# Altium PCB Sic_PowerBoard.PcbDoc
Units mm, origin at the board's own origin, x right, y up, seen from the top; angles counter-clockwise.
Board outline 267.46 x 213.36 mm, 2 copper layers (Top Layer, Bottom Layer), stack 0.142 mm thick; 132 components, 73 nets, 346 pads, 115 vias.
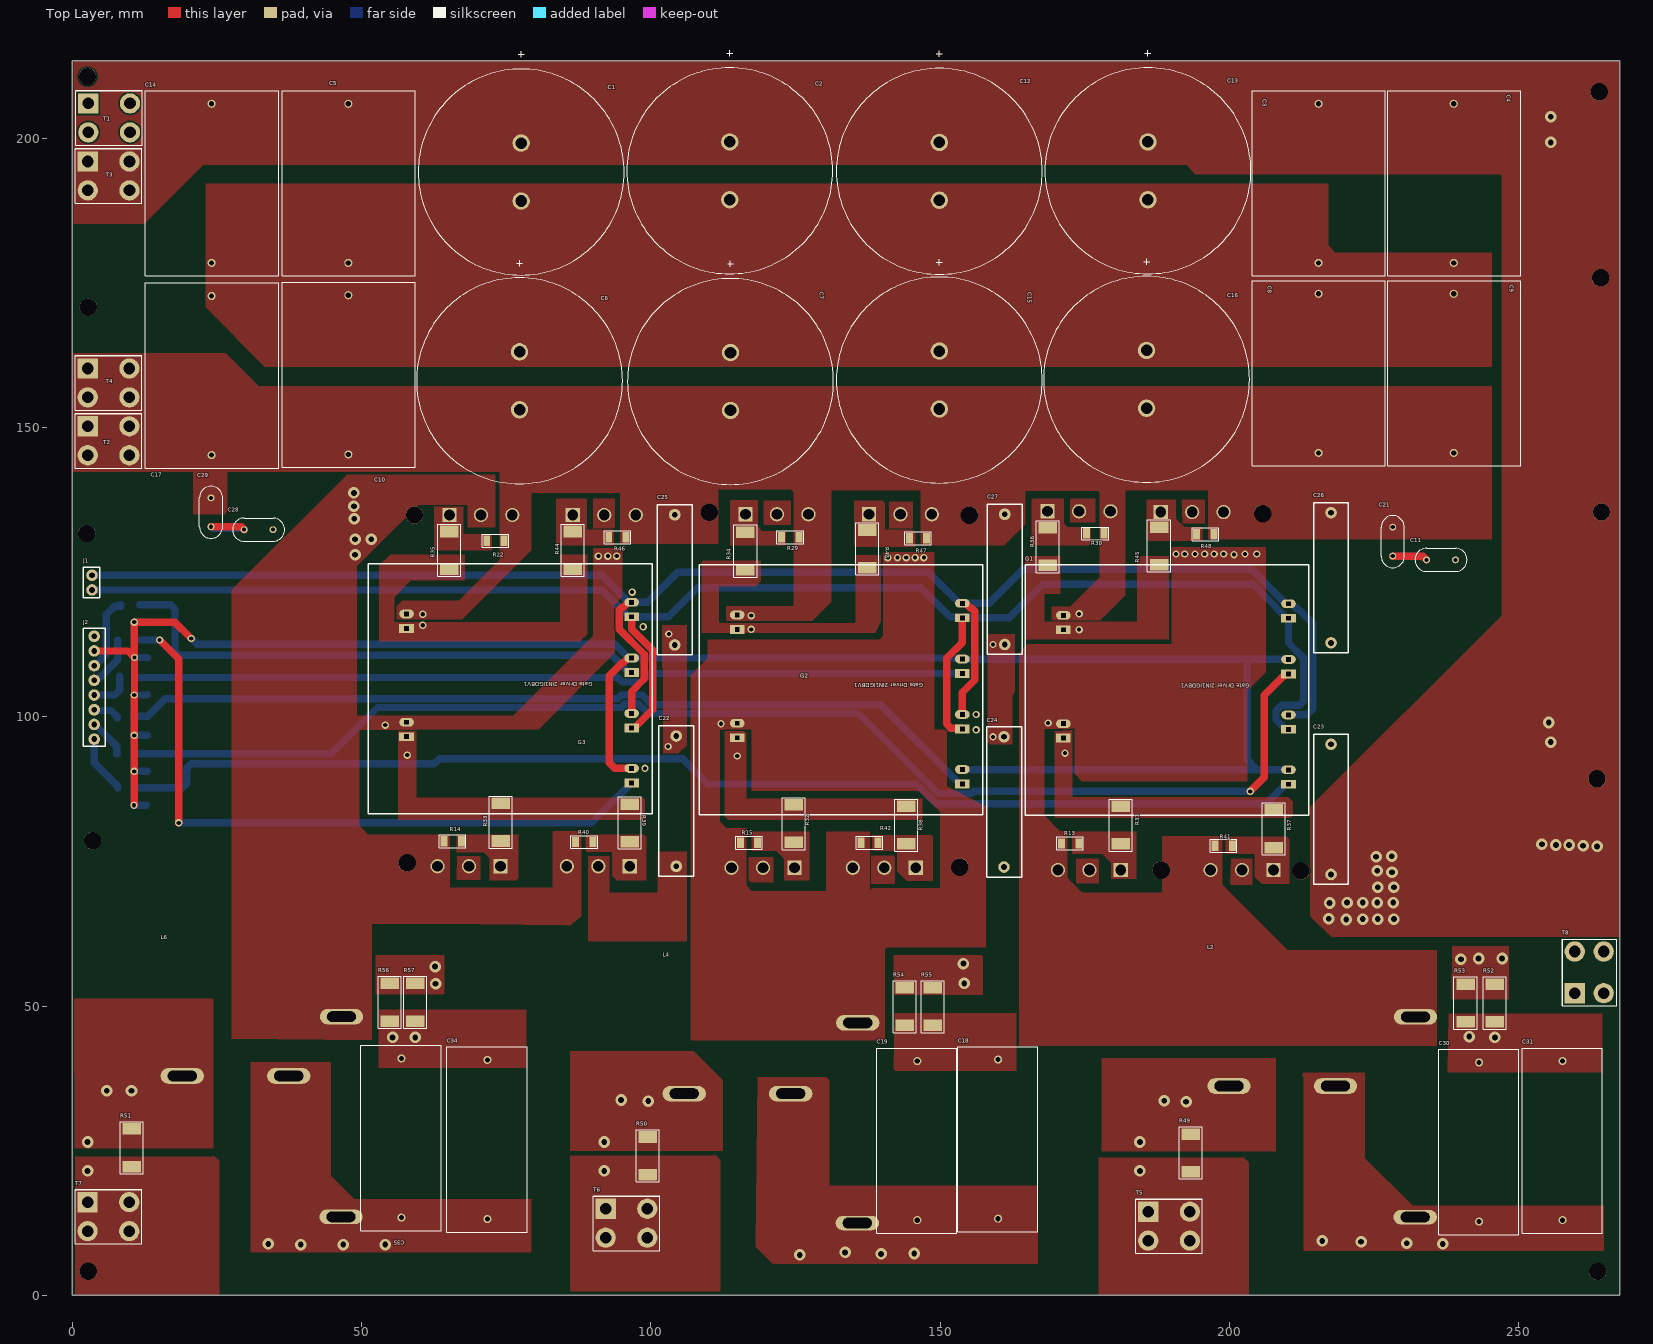
[diagram p0: Top Layer view]
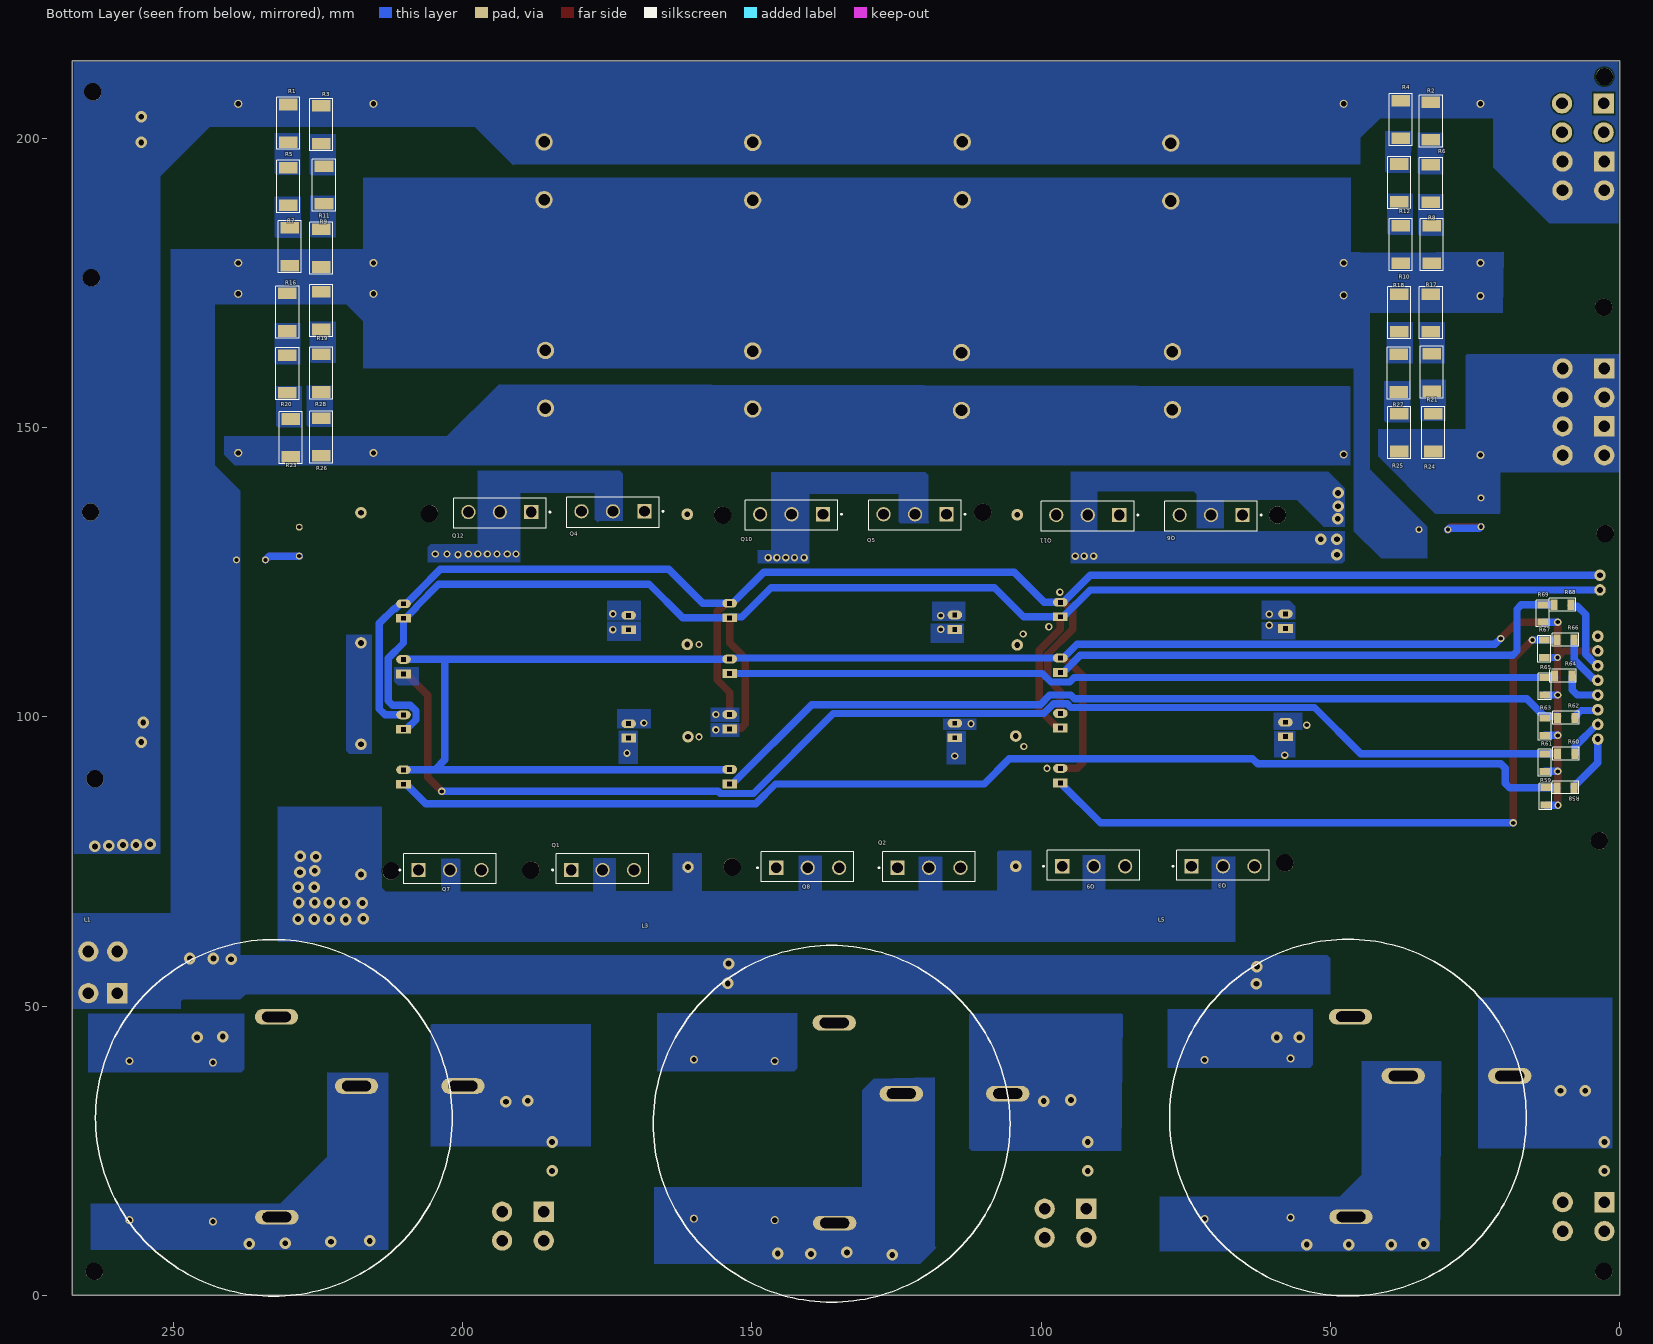
[diagram p1: Bottom Layer view, seen from below]
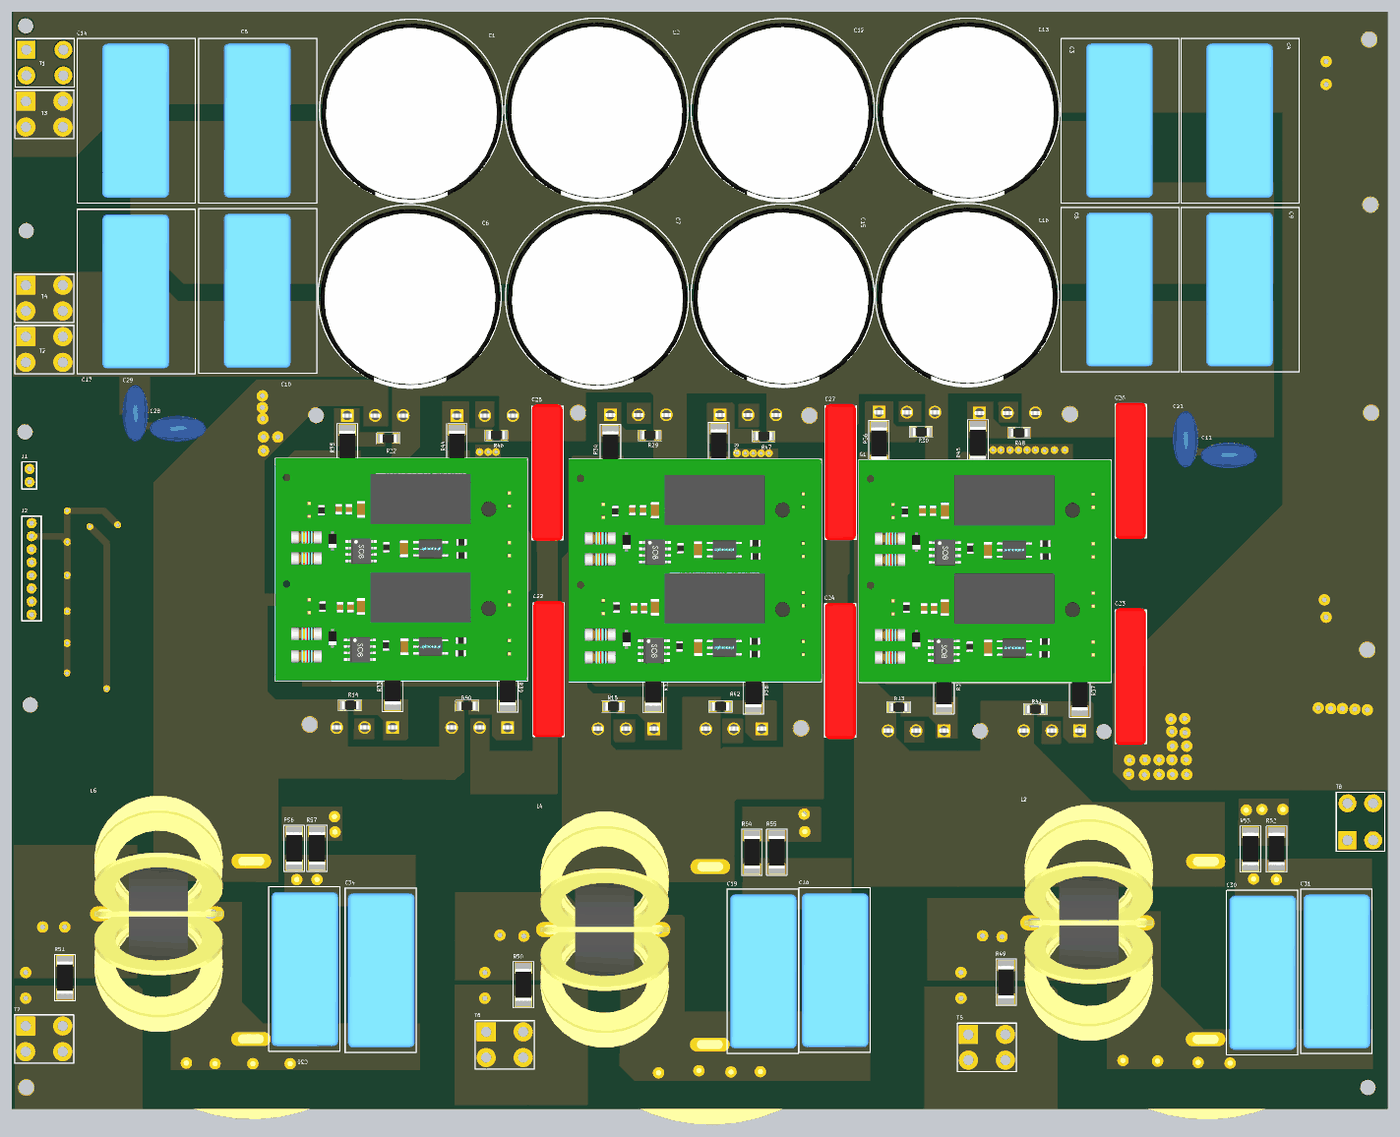
[diagram p2: 3D render of the assembled board from above, using the file's embedded part models]
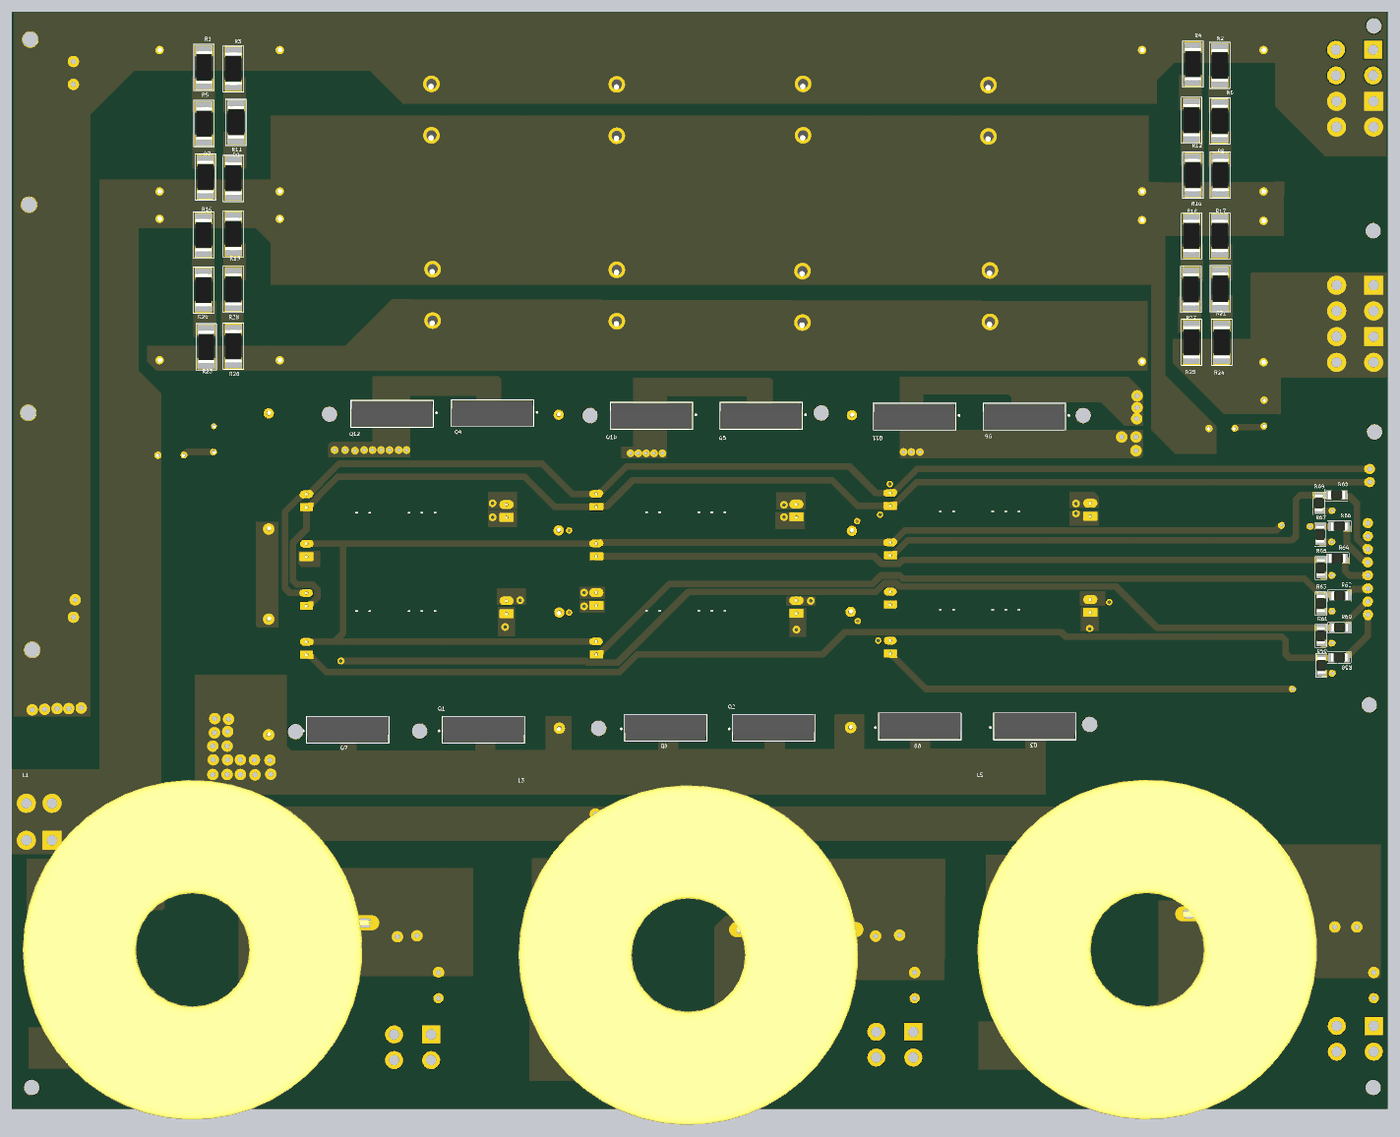
[diagram p3: 3D render of the assembled board from below, using the file's embedded part models]

## Layer stack, top to bottom
Top Solder: solder mask 0.0102, Solder Resist, Dk 3.5
Top Layer: signal copper 0.0356
Dielectric 2: prepreg 0.0711, PP-006, Dk 4.1
Bottom Layer: signal copper 0.0356
Bottom Solder: solder mask 0.0102, Solder Resist, Dk 3.5

## Board outline
0,0 0,212.852 0,213.36 267.462,213.36 267.462,0

## Design rules (kind name [scope] priority, off if disabled: settings)
Clearance [All] p1: gap=0.254 ignorepadtopadclearanceinfootprint=FALSE except(0: Arc-Hole Track-Hole SMDPad-Hole THPad-Hole Via-Hole Fill-Hole Poly-Hole Region-Hole Text-Hole)
ComponentClearance [All] p1: gap=0.254 collisioncheckmode=3 verticalgap=0.1 showdistances=FALSE
Height [All] p1: minheight=0 maxheight=50.8 prefheight=25.4
PolygonConnect [All] p1: connectstyle=Direct reliefconductorwidth=0.254 reliefentries=4 polygonreliefangle="90 Angle" airgapwidth=0.254
RoutingVias [All] p1: holewidth=0.711 width=1.27 viastyle="Through Hole" minholewidth=0.711 minwidth=1.27 maxholewidth=0.711 maxwidth=1.27
SolderMaskExpansion [All] p1: expansion=0.102 istentingtop=FALSE
Width [All] p1: maxlimit=25.4 minlimit=0.254 preferedwidth=0.254 minimp=50.000000 maximp=50.000000 favimp=50.000000
28 further rules are at their usual default settings.

## Components (designator, comment, footprint, x,y, rotation, side; value= is the part's Value field where it differs from the comment)
C1 "220uF" "CAP.EL.220uF 500V" 77.597,189.136 r90 top
C2 "220uF" "CAP.EL.220uF 500V" 113.638,189.357 r90 top
C3 "22uF 500V" "CAP.POL 22UF 500VDC - duplicate" 215.392,178.435 r90 top
C4 "22uF 500V" "CAP.POL 22UF 500VDC - duplicate" 238.76,178.435 r90 top
C5 "22uF 500V" "CAP.POL 22UF 500VDC - duplicate" 47.725,178.435 r90 top
C6 "220uF" "CAP.EL.220uF 500V" 77.316,153.068 r90 top
C7 "220uF" "CAP.EL.220uF 500V" 113.765,152.941 r90 top
C8 "22uF 500V" "CAP.POL 22UF 500VDC - duplicate" 215.392,145.601 r90 top
C9 "22uF 500V" "CAP.POL 22UF 500VDC - duplicate" 238.76,145.601 r90 top
C10 "22uF 500V" "CAP.POL 22UF 500VDC - duplicate" 47.725,145.347 r90 top
C11 "2n2 2000v" "2n2 2000v" 239.061,127.127 r180 top
C12 "220uF" "CAP.EL.220uF 500V" 149.86,189.263 r90 top
C13 "220uF" "CAP.EL.220uF 500V" 185.901,189.357 r90 top
C14 "22uF 500V" "CAP.POL 22UF 500VDC - duplicate" 24.103,178.435 r90 top
C15 "220uF" "CAP.EL.220uF 500V" 149.86,153.195 r90 top
C16 "220uF" "CAP.EL.220uF 500V" 185.674,153.322 r90 top
C17 "22uF 500V" "CAP.POL 22UF 500VDC - duplicate" 24.103,145.22 r90 top
C18 "2.2uF X2" "CAP.POL 2.2UF  x2" 160.02,40.767 r270 top
C19 "2.2uF X2" "CAP.POL 2.2UF  x2" 146.05,40.513 r270 top
C21 "2n2 2000v" "2n2 2000v" 228.219,127.762 r90 top
C22 "680nF bulk" "680nF bulk" 101.394,98.418 r270 top
C23 "680nF bulk" "680nF bulk" 214.551,97 r270 top
C24 "680nF bulk" "680nF bulk" 164.036,72.291 r90 top
C25 "680nF bulk" "680nF bulk" 101.14,136.665 r270 top
C26 "680nF bulk" "680nF bulk" 214.551,137.026 r270 top
C27 "680nF bulk" "680nF bulk" 158.163,136.751 r270 top
C28 "2n2 2000v" "2n2 2000v" 34.718,132.334 r180 top
C29 "2n2 2000v" "2n2 2000v" 24.003,132.842 r90 top
C30 "2.2uF X2" "CAP.POL 2.2UF  x2" 243.146,40.259 r270 top
C31 "2.2uF X2" "CAP.POL 2.2UF  x2" 257.556,40.513 r270 top
C34 "2.2uF X2" "CAP.POL 2.2UF  x2" 71.755,40.708 r270 top
C35 "2.2uF X2" "CAP.POL 2.2UF  x2" 56.896,40.962 r270 top
G1 "GateDriver Board" "Gate Driver" 213.726,126.237 r180 top
G2 "GateDriver Board" "Gate Driver" 157.36,126.307 r180 top
G3 "GateDriver Board" "Gate Driver" 100.21,126.485 r180 top
J1 "2 Pin" 2pin 3.429,124.46 r180 top
J2 "8 Pin" "8 pin connector" 3.81,96.139 r0 top
L1 "267uH" Linverter 232.606,30.683 r0 bottom
L2 "14.4uH" Lgrid 210.6,35.605 r180 top
L3 "267uH" Linverter 136.213,29.667 r0 bottom
L4 "14.4uH" Lgrid 116.459,34.29 r180 top
L5 "267uH" Linverter 46.99,30.734 r0 bottom
L6 "14.4uH" Lgrid 29.718,37.338 r180 top
Q1 "Sic Mosfet" IFX-PG-TO247-3-41 175.789,73.533 r180 bottom
Q2 "Sic Mosfet" IFX-PG-TO247-3-41 119.38,73.914 r180 bottom
Q3 "Sic Mosfet" IFX-PG-TO247-3-41 68.58,74.168 r180 bottom
Q4 "Sic Mosfet" IFX-PG-TO247-3-41 174.011,135.509 r0 bottom
Q5 "Sic Mosfet" IFX-PG-TO247-3-41 121.793,135.001 r0 bottom
Q6 "Sic Mosfet" IFX-PG-TO247-3-41 70.633,134.874 r0 bottom
Q7 "Sic Mosfet" IFX-PG-TO247-3-41 202.184,73.533 r180 bottom
Q8 "Sic Mosfet" IFX-PG-TO247-3-41 140.356,73.914 r180 bottom
Q9 "Sic Mosfet" IFX-PG-TO247-3-41 90.932,74.168 r180 bottom
Q10 "Sic Mosfet" IFX-PG-TO247-3-41 143.129,135.001 r0 bottom
Q11 "Sic Mosfet" IFX-PG-TO247-3-41 91.948,134.874 r0 bottom
Q12 "Sic Mosfet" IFX-PG-TO247-3-41 193.548,135.382 r0 bottom
R1 "330k 1W Each" R-2512W 230.124,202.565 r90 bottom
R2 "1" R-2512W 32.639,202.946 r90 bottom
R3 "1" R-2512W 224.409,202.311 r90 bottom
R4 "1" R-2512W 37.846,203.2 r90 bottom
R5 "1" R-2512W 230.124,191.643 r90 bottom
R6 "1" R-2512W 32.639,192.151 r90 bottom
R7 "1" R-2512W 229.87,181.229 r90 bottom
R8 "1" R-2512W 32.512,181.61 r90 bottom
R9 "1" R-2512W 224.409,180.975 r90 bottom
R10 "1" R-2512W 37.846,181.61 r90 bottom
R11 "1" R-2512W 223.941,191.877 r90 bottom
R12 "1" R-2512W 38.1,192.278 r90 bottom
R13 "10k" R-1206 172.466,78.105 r0 top
R14 "10k" R-1206 65.786,78.486 r0 top
R15 "10k" R-1206 116.967,78.232 r0 top
R16 "330k 1W Each" R-2512W 230.251,169.926 r90 bottom
R17 "1" R-2512W 32.639,169.799 r90 bottom
R18 "1" R-2512W 38.1,169.799 r90 bottom
R19 "1" R-2512W 224.409,170.18 r90 bottom
R20 "1" R-2512W 230.251,159.258 r90 bottom
R21 "1" R-2512W 32.512,159.512 r90 bottom
R22 "10k" R-1206 73.152,130.429 r180 top
R23 "1" R-2512W 229.694,148.209 r90 bottom
R24 "1" R-2512W 32.258,149.098 r90 bottom
R25 "1" R-2512W 38.1,149.098 r90 bottom
R26 "1" R-2512W 224.409,148.336 r90 bottom
R27 "1" R-2512W 38.227,159.385 r90 bottom
R28 "1" R-2512W 224.409,159.385 r90 bottom
R29 "10k" R-1206 124.079,131.064 r180 top
R30 "10k" R-1206 176.784,131.699 r180 top
R31 "2.2R" R-2512W 181.208,81.28 r270 top
R32 "2.2R" R-2512W 124.714,81.534 r270 top
R33 "2.2R" R-2512W 74.041,81.788 r270 top
R34 "2.2R" R-2512W 116.353,128.651 r90 top
R35 "2.2R" R-2512W 65.193,128.778 r90 top
R36 "2.2R" R-2512W 168.571,129.413 r90 top
R37 "2.2R" R-2512W 207.624,80.645 r270 top
R38 "2.2R" R-2512W 144.145,81.28 r270 top
R39 "2.2R" R-2512W 96.372,81.661 r270 top
R40 "10k" R-1206 88.519,78.359 r0 top
R41 "10k" R-1206 199.009,77.724 r0 top
R42 "10k" R-1206 137.795,78.232 r0 top
R43 "2.2R" R-2512W 137.414,129.032 r90 top
R44 "2.2R" R-2512W 86.508,128.778 r90 top
R45 "2.2R" R-2512W 187.833,129.54 r90 top
R46 "10k" R-1206 94.234,131.064 r180 top
R47 "10k" R-1206 146.177,130.874 r180 top
R48 "10k" R-1206 195.834,131.536 r180 top
R49 "10mR 6W" R-2512W 193.294,24.638 r90 top
R50 "10mR 6W" R-2512W 99.441,24.13 r90 top
R51 "10mR 6W" R-2512W 10.287,25.527 r90 top
R52 "0.5R 6W" R-2512W 245.872,50.546 r270 top
R53 "0.5R 6W" R-2512W 240.792,50.546 r270 top
R54 "0.5R 6W" R-2512W 143.891,49.911 r270 top
R55 "0.5R 6W" R-2512W 148.717,49.911 r270 top
R56 "0.5R 6W" R-2512W 54.864,50.673 r270 top
R57 "0.5R 6W" R-2512W 59.309,50.673 r270 top
R58 "10k" R-1206 9.398,87.759 r180 bottom
R59 "10k" R-1206 12.827,86.259 r90 bottom
R60 "10k" R-1206 9.271,93.599 r180 bottom
R61 "10k" R-1206 12.954,92.075 r90 bottom
R62 "10k" R-1206 9.271,99.798 r180 bottom
R63 "10k" R-1206 12.954,98.298 r90 bottom
R64 "10k" R-1206 9.779,107.061 r180 bottom
R65 "10k" R-1206 12.954,105.283 r90 bottom
R66 "10k" R-1206 9.398,113.284 r180 bottom
R67 "10k" R-1206 13.081,111.76 r90 bottom
R68 "10k" R-1206 9.906,119.38 r180 bottom
R69 "10k" R-1206 13.335,117.856 r90 bottom
T1 "TCon" tCon 2.794,205.994 r0 top
T2 "TCon" tCon 2.692,150.195 r0 top
T3 "TCon" tCon 2.706,195.961 r0 top
T4 "TCon" tCon 2.692,160.194 r0 top
T5 "TCon" tCon 185.967,14.478 r0 top
T6 "TCon" tCon 92.202,14.986 r0 top
T7 "TCon" tCon 2.667,16.129 r0 top
T8 "TCon" tCon 259.668,52.236 r90 top

## Footprints (in the part's own frame and the unit in brackets; to place one, negate y for a bottom-side part, rotate by r counter-clockwise, add the part's x,y. Pads: shape width x height; smd on the part's side, far side on the other; paste and mask are expansions set on the pad)
"2n2 2000v" [mm]
  round 1.2 hole 0.7: 1(0,0) 2(5,0)
  silkscreen extent -2,-2 7,2, body extent -3.05,-2.47 7.95,2.53, height 12.5
2pin [mm]
  round 2 hole 1: 1(0,0) 2(0,2.54)
  silkscreen extent -1.38,-1.4 1.48,3.93
"8 pin connector" [mm]
  round 2 hole 1: 1(0,0) 2(0,2.54) 3(0,5.08) 4(0,7.62) 5(0,10.16) 6(0,12.7) 7(0,15.24) 8(0,17.78)
  silkscreen extent -1.88,-1.22 1.88,19.15
"680nF bulk" [mm]
  round 2 hole 1: 1(1.75,3) 2(24.25,3)
  silkscreen extent 0,-0.03 25.95,6, body extent -0.35,-0.05 26.15,5.95, height 15
"CAP.EL.220uF 500V" [mm]
  round 3 hole 2: 1(0,0) 2(10,0)
  silkscreen extent -12.8,-17.8 25.85,17.8, body extent -13.03,-17.57 21.99,17.42, height 40.03
"CAP.POL 2.2UF  x2" [mm]
  round 1.4 hole 0.9: 1(0,0) 2(27.5,0)
  silkscreen extent -2.25,-6.98 29.75,6.86, body extent -1.22,-6.45 28.77,6.55, height 23.01
"CAP.POL 22UF 500VDC - duplicate" [mm]
  round 1.4 hole 0.9: 1(0,0) 2(27.5,0)
  silkscreen extent -2.25,-11.56 29.75,11.43, body extent -1.22,-6.45 28.77,6.55, height 23.01
"Gate Driver" [mil]
  rect 99.37x60 hole 30 square: 1(138.78,1492.13) 3(138.78,1118.11) 5(138.78,741.14) 7(138.78,362.2) 9(1670.28,1178.15) 11(1670.28,440.94)
  oval 99.37x60 hole 30 square: 2(138.78,1393.7) 4(138.78,1019.68) 6(138.78,642.72) 8(138.78,263.78) 10(1670.28,1079.72) 12(1670.28,342.52)
  silkscreen extent 0,0 1929,1703, body extent 0,0 1933,1703, height 565
IFX-PG-TO247-3-41 [mm] "TO247-Diode; 3 pin, 5.44 mm pitch, 15.90 mm L X 5.00 mm W X 26.00 mm H body"
  rect 2.46x2.46 hole 1.86 paste+0 mask+0: 1(-5.44,0)
  round 2.46 hole 1.86 paste+0 mask+0: 2(0,0) 3(5.44,0)
  silkscreen extent -8.78,-2.4 8,2.8, body extent -7.95,-2.23 7.95,2.77, height 26
Lgrid [mm]
  oval 7.5x2.7 hole 1.8 slot 5 at 0 deg: 1(10.687,-0.59) 2(-7.713,-0.59)
  body extent -11.28,-23.59 13.72,22.41, height 48.01
Linverter [mm]
  oval 7.5x2.5 hole 1.8 slot 5 at 0 deg: 1(-0.525,17.15)
  oval 7.5x2.7 hole 1.8 slot 5 at 0 deg: 2(-0.45,-17.45)
  silkscreen extent -30.83,-30.83 30.83,30.83, body extent -33.3,-33.27 32.74,32.77, height 43.89
R-1206 [mm]
  rect 1.2x1.8 smd: 1(-1.5,0) 2(1.5,0)
  silkscreen extent -2.33,-1.1 2.27,1.13, body extent -1.6,-0.78 1.6,0.83, height 0.56
R-2512W [mm] "resistor 2512 wave soldering"
  rect 2x3.2 smd: 1(-3.25,0) 2(3.25,0)
  silkscreen extent -4.5,-2 4.5,2, body extent -3.15,-1.55 3.15,1.55, height 0.55
tCon [mm]
  round 3.5 hole 2: 1(0,-5) 1(7.2,-5) 1(7.2,0)
  rect 3.5x3.5 hole 2: 1(0,0)
  silkscreen extent -2.15,-7.22 9.35,2.18

## Part data
C1 C2 C6 C7 C12 C13 C15 C16: library part "CAP.EL.220uF 500V", ComponentLink1Description=https://www.ozdisan.com/pasif-komponentler/kondansatorler/aluminyum-kondansatorler/K055002210PM0E040, ComponentLink1URL=https://www.ozdisan.com/pasif-komponentler/kondansatorler/aluminyum-kondansatorler/K055002210PM0E040
C3 C4 C5 C8 C9 C10 C14 C17: library part "CAP.POL 22UF 500VDC", ComponentLink1Description=https://www.ozdisan.com/pasif-komponentler/kondansatorler/film-kondansatorler/C3D2H226JB00C00, ComponentLink1URL=https://www.ozdisan.com/pasif-komponentler/kondansatorler/film-kondansatorler/C3D2H226JB00C00
L1 L3 L5: library part Linverter
L2 L4 L6: library part Lgrid
Q1 Q2 Q3 Q4 Q5 Q6 Q7 Q8 Q9 Q10 Q11 Q12: library part "Sic Mosfet To247", "SiC Mosfet To247"
R1 R2 R3 R4 R5 R6 R7 R8 R9 R10 R11 R12 R16 R17 R18 R19 R20 R21 R23 R24 R25 R26 R27 R28 R31 R32 R33 R34 R35 R36 R37 R38 R39 R43 R44 R45: library part "0207 melf", ComponentLink1Description=https://www.ozdisan.com/pasif-komponentler/direncler/smt-smd-direncler/M271UFG100KT20, ComponentLink1URL=https://www.ozdisan.com/pasif-komponentler/direncler/smt-smd-direncler/M271UFG100KT20
R13 R14 R15 R22 R29 R30 R40 R41 R42 R46 R47 R48 R58 R59 R60 R61 R62 R63 R64 R65 R66 R67 R68 R69: library part R-1206, "Res1206"
R49 R50 R51 R52 R53 R54 R55 R56 R57: library part IsabelShunt, ComponentLink1Description=https://www.ozdisan.com/pasif-komponentler/direncler/smt-smd-direncler/M271UFG100KT20, ComponentLink1URL=https://www.ozdisan.com/pasif-komponentler/direncler/smt-smd-direncler/M271UFG100KT20
T1 T2 T3 T4 T5 T6 T7 T8: library part "Terminal Connector", ComponentLink1Description=https://www.ozdisan.com/konnektor-baglanti-elemanlari/terminal-konnektorler/vida-tipi-konnektorler/K36-00AH, ComponentLink1URL=https://www.ozdisan.com/konnektor-baglanti-elemanlari/terminal-konnektorler/vida-tipi-konnektorler/K36-00AH

## Free pads (board coordinates)
  round 3 hole 3: 71(2.526,131.664) 71(2.66,210.636) 71(2.78,4.156) 71(2.78,170.78) 71(3.542,78.578) 71(57.898,74.768) 71(59.168,134.871) 71(110.095,135.347) 71(153.406,74.031) 71(155.053,134.839) 71(188.2,73.498) 71(205.726,135.114) 71(212.33,73.371) 71(263.525,89.281) 71(263.638,4.156) 71(263.892,207.991) 71(264.146,175.86) 71(264.287,135.382)

## Via types
v1: diameter 2, hole 1, Top Layer to Bottom Layer, 67 vias
v2: diameter 1.27, hole 0.711, Top Layer to Bottom Layer, 48 vias

## Nets (pads, with @x,y where several pads share a name; then routed paths per layer and width w, separated by ;. In a path a pad name is that pad's centre, name@x,y a point inside that pad or via, vN(x,y) a via of type N, cw(c..) or ccw(c..) an arc to the next point about the centre after c; other vN are vias at no path point)
A: G1.10 L1.2 pad.71@188.2,73.498 Q1.3 Q4.2 Q7.3 Q12.2 R13.1 R41.1
  other v2: 168.656,98.933 200.787,128.016 190.754,128.143 192.278,128.143 194.056,128.143 195.707,128.143 197.358,128.143 198.988,128.143 202.692,128.143 204.724,128.143
B: G2.10 L3.2 pad.71@153.406,74.031 Q2.3 Q5.2 Q8.3 Q10.2 R15.1 R42.1
  other v2: 112.141,98.806 140.97,127.508 142.621,127.508 144.145,127.508 145.669,127.508 147.193,127.508
C: G3.10 L5.2 pad.71@57.898,74.768 pad.71@59.168,134.871 Q3.3 Q6.2 Q9.3 Q11.2 R14.1 R40.1
  other v1: 48.895,128.016 48.895,130.683 51.689,130.683 48.768,134.239 48.691,136.398 48.691,138.684
  other v2: 54.11,98.552 90.932,127.762 92.583,127.762 94.107,127.762
GND: C6.1 C7.1 C8.1 C9.1 C10.1 C15.1 C16.1 C17.1 C21.2 C25.1 C26.1 C27.1 C29.2 G1.12 G2.12 G3.12 pad.71@110.095,135.347 pad.71@155.053,134.839 pad.71@205.726,135.114 Q4.3 Q5.3 Q6.3 Q10.3 Q11.3 Q12.3 R22.1 R23.1 R24.1 R25.1 R26.1 R29.1 R30.1 R46.1 R47.1 R48.1 T2.1 T4.1
  other v2: 117.348,117.475 60.579,117.729 174.011,117.785
NetC1_2: C1.2 C2.2 C3.2 C4.2 C5.2 C12.2 C13.2 C14.2 C22.2 C23.2 C24.1 pad.71@263.525,89.281 pad.71@263.892,207.991 pad.71@264.146,175.86 pad.71@264.287,135.382 Q1.2 Q2.2 Q3.2 Q7.2 Q8.2 Q9.2 R1.2 R2.2 R3.2 R4.2 T3.1
  other v1: 220.192,64.967 223.05,65.036 225.628,65.036 228.422,65.036 217.144,65.094 217.297,67.818 217.297,67.818 220.319,67.888 223.05,67.888 225.526,67.888 228.32,67.888 225.628,70.555 228.422,70.555 228.092,73.152 225.52,73.387 225.342,75.8 228.034,75.909 263.525,77.597 261.112,77.724 256.413,77.851 258.699,77.851 254,77.978 255.524,95.631 255.18,99.011 255.524,199.263 255.524,203.708
NetC11_2: C11.2 C21.1 | length 12.2
  Top Layer w1.27: C21.1 233.426,127.762 C11.2
  Bottom Layer w1.27: C21.1 233.426,127.762 C11.2
NetC18_1: C18.1 C19.1 R54.2 R55.2
NetC18_2: C18.2 C19.2 L3.1 L4.2
  other v1: 125.726,7.007 139.801,7.182 145.516,7.251 133.578,7.436
NetC22_1: C22.1 C25.2
  other v2: 102.997,94.869 103.129,114.3
NetC23_1: C23.1 C26.2
NetC24_2: C24.2 C27.2
  other v2: 159.131,96.541 159.131,112.501
NetC28_2: C28.2 C29.1 | length 11.9
  Top Layer w1.27: C29.1 29.21,132.842 C28.2
  Bottom Layer w1.27: C29.1 24.257,132.588 29.464,132.588 C28.2
NetC30_1: C30.1 C31.1 R52.2 R53.2
  other v1: 245.868,44.599 241.423,44.726
NetC30_2: C30.2 C31.2 L1.1 L2.2
  other v1: 236.851,8.912 230.628,9.039 222.754,9.293 216.023,9.42
NetC34_1: C34.1 C35.1 R56.2 R57.2
  other v1: 55.368,44.599 59.305,44.599
NetC34_2: C34.2 C35.2 L5.1 L6.2
  other v1: 39.493,8.785 46.842,8.785 54.098,8.785 33.905,8.912
NetG1_1: G1.1 R58.1 R59.2 | length 207.5
  Bottom Layer w1.27: R58.1 R59.2 19.066,87.759 19.81,88.503 19.81,91.117 20.554,91.861 62.595,91.861 63.47,92.736 105.511,92.736 109.855,88.392 145.927,88.392 149.356,84.963 206.327,84.963 209.701,88.337 G1.1
NetG1_2: G1.2 G1.6 G2.2 G2.6 G3.2 G3.6 J2.7 R59.1 R61.1 R63.1 R65.1 R67.1 R69.1 | length 356.2
  Top Layer w1.27: J2.7 9.652,111.379 v2@10.721,110.31 ; v2(10.683,84.724) 10.721,84.762 v2(10.721,90.575) v2(10.721,96.798) v2(10.721,103.759) 10.771,103.809 v2(10.771,110.26) v2@10.721,110.31 ; v2(20.574,113.538) 17.756,116.356 v2(10.721,116.356) v2@10.721,110.31 ; G3.2 96.636,91.134 93.76,91.134 92.837,92.057 92.837,107.093 95.055,109.311 95.267,109.311 96.116,110.16 G3.6
  Bottom Layer w1.27: J2.7 J2.7@3.941,111.379 ; v2(10.683,84.724) 12.792,84.724 R59.1 ; v2(10.721,90.575) R61.1 ; v2(10.721,96.798) R63.1 ; v2(10.721,103.759) 12.93,103.759 R65.1 ; v2(10.721,116.356) R69.1 ; v2(10.771,110.26) R67.1 ; v2(20.574,113.538) 21.59,112.522 93.823,112.522 96.102,110.243 96.602,110.243 G3.6 153.088,110.16 153.266,109.982 G2.6 153.87,109.947 203.073,109.947 210.166,109.947 G1.6 ; G3.2 G3.2@97.254,91.085 ; G2.2 153.87,90.872 204.766,90.872 ; 203.073,109.855 203.073,92.565 204.766,90.872 ; G1.2 210.166,90.872 204.766,90.872
NetG1_3: G1.3 G1.7 G2.3 G2.7 G3.3 G3.7 J1.2 | length 288.3
  Top Layer w1.27: G3.3 97.185,98.085 100.36,101.26 100.36,111.475 96.685,115.15 G3.7 ; G2.3 153.708,98.034 151.856,98.034 151.112,98.778 151.112,110.094 153.835,112.817 G2.7
  Bottom Layer w1.27: J1.2 91.55,121.92 96.185,117.285 G3.7 103.061,117.285 108.077,122.301 146.685,122.301 151.752,117.234 153.708,117.234 G2.7 161.938,117.107 167.767,122.936 204.089,122.936 208.05,118.975 208.05,118.853 209.574,117.329 209.574,117.164 209.701,117.037 G1.7 210.201,112.746 212.852,110.096 212.852,102.732 212.108,101.988 209.017,101.988 208.05,101.021 208.05,99.488 209.701,97.837 G1.3
  other v2: 156.21,97.737
NetG1_4: G1.4 G1.8 G2.4 G2.8 G3.4 G3.8 J1.1 | length 287.5
  Top Layer w1.27: G3.4 96.685,104.379 98.836,106.53 98.836,110.844 94.534,115.146 94.534,118.415 95.055,118.936 95.267,118.936 96.116,119.785 G3.8 ; G2.4 153.835,104.201 155.986,106.352 155.986,118.237 155.465,118.758 155.253,118.758 154.404,119.607 G2.8
  Bottom Layer w1.27: J1.1@3.556,124.46 91.51,124.46 96.185,119.785 G3.8 99.465,119.785 104.648,124.968 147.974,124.968 153.335,119.607 G2.8 158.469,119.607 164.338,125.476 203.835,125.476 207.569,121.742 207.569,121.668 209.618,119.62 210.118,119.62 G1.8 210.77,119.537 211.619,118.688 211.831,118.688 214.376,116.143 214.376,101.346 213.367,100.337 G1.4
  other v2: 156.21,100.407
NetG1_5: G1.5 R60.1 R61.2 | length 225.7
  Top Layer w1.27: v2(203.581,87.122) 205.994,89.535 205.994,103.705 209.574,107.285 210.074,107.285 G1.5
  Bottom Layer w1.27: R60.1@11.129,93.599 R61.2@12.954,93.599 ; R61.2@13.219,93.599 44.778,93.599 52.779,101.6 94.865,101.6 95.501,102.236 97.869,102.236 99.545,100.56 135.914,100.56 149.718,86.756 155.465,86.756 155.831,87.122 v2(203.581,87.122)
NetG1_9: G1.9 R31.1 R37.1
  other v2: 171.577,93.726
NetG1_11: G1.11 R36.1 R45.1
  other v2: 174.011,115.062
NetG2_1: G2.1 R62.1 R63.2 | length 151
  Bottom Layer w1.27: R62.1@10.721,100.076 13.067,100.076 16.115,103.124 94.234,103.124 94.87,103.76 98.5,103.76 100.176,102.084 139.658,102.084 153.335,88.407 G2.1
NetG2_5: G2.5 R64.1 R65.2 | length 143.5
  Bottom Layer w1.27: R64.1@11.279,106.783 94.281,106.783 95.055,106.009 98.315,106.009 99.788,107.482 G2.5
NetG2_9: G2.9 R32.1 R38.1
  other v2: 114.935,93.218
NetG2_11: G2.11 R34.1 R43.1
  other v2: 117.348,115.107
NetG3_1: G3.1 R66.1 R67.2 | length 118.4
  Top Layer w1.27: v2(15.113,113.284) 18.415,109.982 v2(18.415,81.661)
  Bottom Layer w1.27: R66.1 10.91,113.272 13.069,113.272 R67.2 13.105,113.284 v2(15.113,113.284) ; v2(18.415,81.661) 89.761,81.661 G3.1
NetG3_5: G3.5 R68.1 R69.2 | length 94.1
  Bottom Layer w1.27: R68.1@11.684,119.356 R69.2 17.036,119.356 17.78,118.612 17.78,111.361 18.524,110.617 93.228,110.617 96.185,107.66 G3.5
NetG3_9: G3.9 R33.1 R39.1
  other v2: 57.912,93.385
NetG3_11: G3.11 R35.1 R44.1
  other v2: 60.579,115.824
NetJ2_1: J2.1 R58.2 | length 10.1
  Bottom Layer w1.27: J2.1 3.81,92.077 7.898,87.989 R58.2
NetJ2_2: J2.2 R60.2 | length 6.8
  Bottom Layer w1.27: J2.2 3.941,98.679 7.736,94.884 7.736,93.634 R60.2
NetJ2_3: J2.3 R62.2 | length 4.7
  Bottom Layer w1.27: J2.3 3.945,101.084 6.715,101.084 7.771,100.028 R62.2
NetJ2_4: J2.4 R64.2 | length 7.2
  Bottom Layer w1.27: J2.4 7.366,103.759 8.244,104.637 8.244,107.026 R64.2
NetJ2_5: J2.5 R66.2 | length 9
  Bottom Layer w1.27: J2.5 4.008,106.299 4.373,106.664 4.683,106.664 7.898,109.879 R66.2
NetJ2_6: J2.6 R68.2 | length 13.1
  Bottom Layer w1.27: J2.6 3.941,108.839 5.91,110.808 5.91,117.67 7.366,119.126 8.371,119.126 8.406,119.161 R68.2
NetJ2_8: J2.8
NetL2_1: L2.1 R49.2
  other v1: 184.531,26.523 192.506,33.471 188.722,33.655
NetL4_1: L4.1 R50.2
  other v1: 91.948,26.523 99.542,33.598 94.869,33.782
NetL6_1: L6.1 R51.2
  other v1: 2.667,26.523 5.969,35.376 10.261,35.376
NetQ1_1: Q1.1 R13.2 R31.2
NetQ2_1: Q2.1 R15.2 R32.2
NetQ3_1: Q3.1 R14.2 R33.2
NetQ4_1: Q4.1 R30.2 R36.2
NetQ5_1: Q5.1 R29.2 R34.2
NetQ6_1: Q6.1 R22.2 R35.2
NetQ7_1: Q7.1 R37.2 R41.2
NetQ8_1: Q8.1 R38.2 R42.2
NetQ9_1: Q9.1 R39.2 R40.2
NetQ10_1: Q10.1 R43.2 R47.2
NetQ11_1: Q11.1 R44.2 R46.2
NetQ12_1: Q12.1 R45.2 R48.2
NetR1_1: R1.1 R5.2
NetR2_1: R2.1 R6.2
NetR3_1: R3.1 R11.2
NetR4_1: R4.1 R12.2
NetR5_1: R5.1 R7.2
NetR6_1: R6.1 R8.2
NetR9_2: R9.2 R11.1
NetR10_2: R10.2 R12.1
NetR16_1: R16.1 R20.2
NetR17_1: R17.1 R21.2
NetR18_1: R18.1 R27.2
NetR19_1: R19.1 R28.2
NetR20_1: R20.1 R23.2
NetR21_1: R21.1 R24.2
NetR25_2: R25.2 R27.1
NetR26_2: R26.2 R28.1
NetR49_1: R49.1 T5.1
  other v1: 184.531,21.523
NetR50_1: R50.1 T6.1
  other v1: 91.948,21.523
NetR51_1: pad.71@2.78,4.156 R51.1 T7.1
  other v1: 2.667,21.523
PGND: C1.1 C2.1 C3.1 C4.1 C5.1 C6.2 C7.2 C8.2 C9.2 C10.2 C11.1 C12.1 C13.1 C14.1 C15.2 C16.2 C17.2 C28.1 R7.1 R8.1 R9.1 R10.1 R16.2 R17.2 R18.2 R19.2 R52.1 R53.1 R54.1 R55.1 R56.1 R57.1 T8.1
  other v1: 62.814,53.866 154.152,53.918 62.712,56.839 154.025,57.347 240.004,58.109 243.052,58.236 247.116,58.236
pads on no net: T1.1
copper on no net:
  other v2: 98.996,91.085 98.679,115.57 96.774,121.539

## Polygon pours and split planes (outlines as drawn)
NetC1_2 on Top Layer "NETC1_2_L01_P113" (solid, pour order 113): 66.548,75.882 70.485,75.882 70.485,71.882 66.421,71.882
NetC1_2 on Top Layer "NETC1_2_L01_P112" (solid, pour order 112): 89.154,75.882 92.837,75.882 92.837,69.596 101.219,69.596 101.219,76.708 106.172,76.708 106.172,61.341 105.918,61.087 105.791,61.214 89.154,61.214
NetC1_2 on Top Layer "NETC1_2_L01_P111" (solid, pour order 111): 116.967,75.755 121.158,75.755 121.158,71.374 117.348,71.374 116.967,71.755
NetC1_2 on Top Layer "NETC1_2_L01_P110" (solid, pour order 110): 138.112,75.946 141.986,75.946 142.177,75.755 142.177,71.12 137.922,71.12
NetC1_2 on Top Layer "NETC1_2_L01_P109" (solid, pour order 109): 173.482,75.438 177.419,75.438 177.419,71.247 173.482,71.247
NetC1_2 on Top Layer "NETC1_2_L01_P108" (solid, pour order 108): 200.279,75.438 203.962,75.438 203.962,70.993 200.279,70.993 200.152,71.12
A on Top Layer "A_L01_P107" (solid, pour order 107): 191.77,137.541 195.707,137.541 195.707,133.477 191.897,133.477
A on Top Layer "A_L01_P106" (solid, pour order 106): 172.466,137.668 176.784,137.668 176.784,133.604 172.529,133.604 172.466,133.541
B on Top Layer "B_L01_P105" (solid, pour order 105): 141.224,137.16 145.288,137.16 145.288,132.738 145.138,132.588 141.224,132.588
B on Top Layer "B_L01_P104" (solid, pour order 104): 119.507,137.375 124.206,137.375 124.206,133.223 119.634,133.223 119.507,133.35
C on Top Layer "C_L01_P103" (solid, pour order 103): 90.043,137.668 93.751,137.668 93.751,132.725 93.76,132.715 93.633,132.588 90.043,132.588
C on Top Layer "C_L01_P035" (solid, pour order 35): 76.2,100.203 90.043,114.046 90.043,129.159 94.991,129.159 95.055,129.222 95.055,120.709 93.472,119.126 93.76,118.838 93.76,111.032 80.518,97.79 49.657,97.79 49.657,81.153 51.181,79.629 65.278,79.629 65.278,70.485 83.058,70.485 83.058,80.137 83.185,80.264 88.011,80.264 88.011,65.532 86.106,64.008 85.471,64.008 63.373,64.262 51.816,64.262 51.816,44.075 27.559,44.357 27.559,87.63 27.559,121.92 47.498,141.859 73.152,141.859 73.152,132.715 68.453,132.715 68.326,132.842 68.326,136.652 59.817,136.652 49.149,125.984 49.149,100.203
B on Top Layer "B_L01_P036" (solid, pour order 36): 137.922,69.977 138.303,70.358 149.987,70.358 149.987,83.566 146.304,87.249 117.475,87.249 117.475,97.79 151.112,97.79 151.112,88.029 157.861,84.53 157.861,60.198 140.97,60.198 140.462,59.817 140.462,44.069 106.934,44.069 106.934,107.188 109.855,110.109 109.855,113.284 139.446,113.284 140.208,114.046 140.208,128.397 148.971,128.397 148.971,97.79 111.887,97.79 111.887,81.915 113.03,80.772 116.459,80.772 116.459,70.866 117.475,69.85 130.302,69.85 130.302,80.137 137.795,80.137 137.795,70.104
PGND on Top Layer "PGND_L01_P102" (solid, pour order 102): 23.05,170.751 23.05,192.151 47.625,192.151 217.043,192.151 217.043,181.483 218.313,180.213 245.364,180.213 245.364,160.528 33.274,160.528
NetC24_2 on Top Layer "NETC24_2_L01_P097" (solid, pour order 97): 158.75,114.173 158.824,114.247 162.903,114.247 162.903,104.229 162.433,103.759 162.433,95.25 158.623,95.25 158.242,95.631 158.242,114.3
NetC22_1 on Top Layer "NETC22_1_L01_P095" (solid, pour order 95): 101.981,115.824 106.172,115.824 106.172,95.123 104.775,93.726 102.108,93.726 102.108,108.458 101.981,108.585
NetC18_1 on Top Layer "NETC18_1_L01_P055" (solid, pour order 55): 142.113,48.768 163.195,48.768 163.195,38.862 142.24,38.862 141.986,39.116
NetC34_1 on Top Layer "NETC34_1_L01_P054" (solid, pour order 54): 52.959,49.403 78.486,49.403 78.486,39.37 52.959,39.37
NetC30_2 on Top Layer "NETC30_2_L01_P050" (solid, pour order 50): 212.725,38.481 223.266,38.481 223.393,38.608 223.393,23.749 231.648,15.494 264.668,15.494 264.668,7.747 212.852,7.747 212.852,37.719 212.598,37.973
NetC34_2 on Top Layer "NETC34_2_L01_P048" (solid, pour order 48): 30.861,40.259 44.577,40.259 44.704,40.386 44.704,20.701 48.768,16.637 79.375,16.637 79.375,7.493 30.861,7.493
A on Top Layer "A_L01_P037" (solid, pour order 37): 163.703,111.104 165.121,112.522 189.992,112.522 189.992,129.286 206.248,129.286 206.248,107.696 203.073,104.521 203.073,88.9 174.498,88.9 173.228,90.17 173.228,97.907 172.583,97.907 168.021,97.907 168.021,83.185 167.894,83.058 170.688,80.264 171.958,80.264 171.958,72.175 174.537,69.596 188.341,69.596 188.341,79.375 198.755,79.375 198.755,70.993 210.058,59.69 235.839,59.69 235.839,43.307 235.966,43.18 163.703,43.18
NetG1_9 on Top Layer "NETG1_9_L01_P017" (solid, pour order 17): 169.672,97.536 169.799,97.409 169.799,82.55 210.566,82.55 210.947,82.931 210.947,85.344 210.185,86.106 172.847,86.106 172.847,97.663
NetG2_9 on Top Layer "NETG2_9_L01_P016" (solid, pour order 16): 112.776,97.536 112.776,82.804 113.411,82.169 146.939,82.169 146.939,85.852 116.459,85.852 116.459,97.155 116.078,97.536
NetG3_9 on Top Layer "NETG3_9_L01_P015" (solid, pour order 15): 56.388,97.536 56.388,82.169 98.933,82.169 98.933,85.725 98.679,85.979 59.436,85.979 59.436,97.536
NetG1_11 on Top Layer "NETG1_11_L01_P013" (solid, pour order 13): 170.751,127.762 164.973,127.762 164.719,127.508 164.719,113.411 189.484,113.411 189.484,127.762 185.547,127.762 184.785,127.762 184.023,127 184.023,116.459 168.021,116.459 168.021,121.221 170.751,121.221
NetG3_11 on Top Layer "NETG3_11_L01_P002" (solid, pour order 2): 84.328,116.332 84.328,128.016 89.027,128.016 89.027,114.3 87.757,113.03 53.086,113.03 53.086,126.163 54.939,128.016 67.818,128.016 67.818,123.571 58.547,123.571 55.626,120.65 55.626,116.332
PGND on Top Layer "PGND_L01_P059" (solid, pour order 59): 141.986,58.801 157.099,58.801 157.353,58.547 157.353,51.943 142.177,51.943 142.049,52.07
PGND on Top Layer "PGND_L01_P058" (solid, pour order 58): 52.451,58.801 64.262,58.801 64.262,51.943 64.135,52.07 52.451,52.07
PGND on Top Layer "PGND_L01_P057" (solid, pour order 57): 238.537,60.325 248.285,60.325 248.285,51.181 238.379,51.181
NetC30_1 on Top Layer "NETC30_1_L01_P056" (solid, pour order 56): 237.871,48.641 264.414,48.641 264.414,38.608 237.744,38.608
NetC18_2 on Top Layer "NETC18_2_L01_P049" (solid, pour order 49): 118.491,37.719 130.302,37.719 130.81,37.211 130.81,18.923 166.878,18.923 166.878,7.493 166.878,5.461 121.031,5.461 118.11,8.382 118.11,8.509
NetL4_1 on Top Layer "NETL4_1_L01_P047" (solid, pour order 47): 86.106,42.164 107.442,42.164 112.395,37.211 112.395,25.019 92.075,25.019 86.106,25.019 86.106,30.734
NetL6_1 on Top Layer "NETL6_1_L01_P046" (solid, pour order 46): 0.34,51.308 24.384,51.308 24.384,25.4 0.476,25.4
NetL2_1 on Top Layer "NETL2_1_L01_P045" (solid, pour order 45): 177.927,41.021 196.926,41.021 208.012,41.021 208.012,24.929 177.927,24.929
NetR49_1 on Top Layer "NETR49_1_L01_P044" (solid, pour order 44): 177.405,23.786 202.297,23.786 202.424,23.913 203.313,23.024 203.313,0 177.405,0
NetR50_1 on Top Layer "NETR50_1_L01_P043" (solid, pour order 43): 86.092,24.167 110.984,24.167 111.111,24.294 112,23.405 112,0.762 86.092,0.762
NetR51_1 on Top Layer "NETR51_1_L01_P042" (solid, pour order 42): 0.508,24.003 24.384,24.003 24.511,24.13 25.4,23.241 25.4,0 0.508,0
NetQ7_1 on Top Layer "NETQ7_1_L01_P024" (solid, pour order 24): 199.39,79.248 209.931,79.248 210.312,78.867 210.312,71.12 205.613,71.12 204.343,72.39 204.343,76.327 199.39,76.327
NetQ1_1 on Top Layer "NETQ1_1_L01_P023" (solid, pour order 23): 172.847,80.01 172.882,80.137 183.896,80.137 183.896,71.882 183.769,72.009 179.578,72.009 179.578,74.803 178.054,76.327 172.847,76.327
NetQ8_1 on Top Layer "NETQ8_1_L01_P022" (solid, pour order 22): 138.303,79.502 148.463,79.502 148.717,79.248 148.717,71.628 144.272,71.628 142.621,73.279 142.621,76.835 138.557,76.835 138.303,77.089
NetQ2_1 on Top Layer "NETQ2_1_L01_P021" (solid, pour order 21): 117.475,80.137 127.381,80.137 127.381,71.755 123.063,71.755 123.063,75.438 121.666,76.835 117.475,76.835
NetQ9_1 on Top Layer "NETQ9_1_L01_P020" (solid, pour order 20): 88.773,79.629 98.806,79.629 99.187,79.248 99.187,71.755 94.107,71.755 93.345,72.517 93.345,76.708 88.9,76.708 88.773,76.835
NetQ3_1 on Top Layer "NETQ3_1_L01_P019" (solid, pour order 19): 66.421,79.629 77.089,79.629 77.089,72.136 76.581,71.628 76.454,71.755 72.136,71.755 72.136,75.565 71.12,76.581 66.421,76.581
NetG2_11 on Top Layer "NETG2_11_L01_P012" (solid, pour order 12): 118.999,127 108.966,127 108.779,126.813 108.779,114.554 138.752,114.554 139.7,116.459 139.7,117.729 139.7,127.889 135.382,127.889 135.382,116.205 112.014,116.205 111.76,116.459 111.76,122.555 118.11,122.555 118.999,123.444
NetQ12_1 on Top Layer "NETQ12_1_L01_P011" (solid, pour order 11): 185.674,137.541 190.754,137.541 190.754,134.239 192.278,132.715 195.326,132.715 195.326,131.699 195.326,130.429 185.928,130.429 185.674,130.683
no net on Top Layer "NONET_L01_P010" (solid, pour order 10): 185.166,138.303
NetQ4_1 on Top Layer "NETQ4_1_L01_P009" (solid, pour order 9): 166.116,137.668 171.323,137.668 171.323,133.477 172.085,132.715 176.022,132.715 176.022,130.048 175.641,129.667 165.862,129.667 165.862,137.414
NetQ10_1 on Top Layer "NETQ10_1_L01_P008" (solid, pour order 8): 135.128,137.375 139.915,137.375 139.954,137.414 140.462,136.906 140.462,132.282 145.213,132.282 145.669,131.826 145.669,129.413 135.382,129.413 135.128,129.667
NetQ5_1 on Top Layer "NETQ5_1_L01_P007" (solid, pour order 7): 113.765,137.541 113.892,137.414 118.491,137.414 118.491,132.842 119.253,132.08 123.317,132.08 123.317,129.667 113.765,129.667
NetQ11_1 on Top Layer "NETQ11_1_L01_P006" (solid, pour order 6): 83.693,137.668 88.773,137.668 88.9,137.541 88.9,132.334 93.345,132.334 93.599,132.08 93.599,129.667 83.947,129.667 83.693,129.921
no net on Top Layer "NONET_L01_P005" (solid, pour order 5): 83.693,137.287
NetQ6_1 on Top Layer "NETQ6_1_L01_P004" (solid, pour order 4): 67.564,136.271 67.564,131.572 72.39,131.572 72.517,131.699 72.517,128.778 69.405,128.778 62.611,128.778 62.611,136.271
GND on Top Layer "GND_L01_P001" (solid, pour order 1): 20.828,142.367 20.955,142.24 20.955,135.001 26.289,135.001 26.797,135.509 26.797,142.367 73.914,142.367 73.914,131.318 73.914,127.127 66.802,120.015 57.023,120.015 56.134,119.126 56.134,116.84 67.437,116.84 79.375,128.778 79.375,138.684 94.615,138.684 94.742,138.557 94.742,129.921 111.633,129.921 111.633,139.319 124.206,139.319 124.714,138.811 124.714,119.126 113.03,119.126 113.03,116.84 113.157,116.713 113.157,116.586 127.889,116.586 131.191,119.888 131.191,129.667 131.191,139.192 146.558,139.192 146.685,139.319 146.685,129.667 161.088,129.667 164.719,133.298 164.719,139.065 177.292,139.065 177.546,138.811 177.546,124.079 172.466,118.999 169.291,118.999 169.291,116.713 177.673,116.713 181.991,121.031 181.991,139.192 196.342,139.192 196.342,130.683 245.364,130.683 245.364,157.099 32.258,157.099 26.543,162.814 0.127,162.814 0.127,142.367
NetC1_2 on Top Layer "NETC1_2_L01_P000" (solid, pour order 0): 254.254,213.36 267.462,213.36 267.462,61.976 217.551,61.976 213.995,65.532 213.995,84.455 247.015,117.475 247.015,193.802 194.047,193.802 192.659,195.404 22.684,195.404 12.446,185.166 0.254,185.166 0.254,213.36
NetC1_2 on Bottom Layer "NETC1_2_L02_P030" (solid, pour order 30): 158.623,69.85 158.623,76.454 163.703,76.454 163.703,69.85 173.482,69.85 173.482,75.438 173.609,75.565 177.419,75.565 177.419,69.596 177.546,69.723 200.406,69.723 200.406,75.311 200.533,75.438 203.708,75.438 203.708,69.723 213.233,69.723 213.995,70.485 213.995,84.455 231.902,84.455 231.902,61.087 66.421,61.087 66.421,75.946 70.485,75.819 70.485,70.104 88.9,70.104 88.9,75.946 89.027,76.073 92.837,76.073 92.837,70.104 92.964,69.977 101.854,69.977 101.727,70.104 101.727,76.835 107.315,76.835 107.569,76.581 107.569,69.977 117.094,69.977 117.094,75.692 117.221,75.819 121.158,75.819 121.158,69.977 137.922,69.977 137.922,75.946 141.859,75.946 141.859,69.85
C on Bottom Layer "C_L02_P092" (solid, pour order 92): 50.392,142.367 47.498,139.473 47.498,132.842 51.181,132.842 55.816,137.477 68.453,137.477 68.453,132.588 73.152,132.588 73.152,138.43 73.66,138.938 90.297,138.938 90.297,132.08 47.498,132.08 47.498,127 48.006,126.492 94.869,126.492 94.869,142.367
NetG1_5 on Bottom Layer "NETG1_5_L02_P100" (solid, pour order 100): 207.569,108.585 211.831,108.585 211.831,106.04 211.201,105.41 207.569,105.41
NetG1_3 on Bottom Layer "NETG1_3_L02_P099" (solid, pour order 99): 152.146,98.933 157.099,98.933 157.099,96.541 152.146,96.541
NetG1_4 on Bottom Layer "NETG1_4_L02_P098" (solid, pour order 98): 152.146,101.6 157.099,101.6 157.099,99.187 152.146,99.187
NetC23_1 on Bottom Layer "NETC23_1_L02_P096" (solid, pour order 96): 215.646,114.173 220.091,114.173 220.091,94.107 219.583,93.599 215.646,93.599
A on Bottom Layer "A_L02_P094" (solid, pour order 94): 197.358,129.794 205.486,129.794 205.994,129.286 205.994,126.746 197.358,126.746 189.992,126.746 189.992,138.684 177.165,138.684 177.165,134.112 176.657,133.604 176.403,133.858 172.339,133.858 172.339,141.986 172.847,142.494 197.358,142.494
B on Bottom Layer "B_L02_P093" (solid, pour order 93): 146.685,128.698 146.765,128.778 148.971,128.778 148.971,126.492 146.685,126.492 140.081,126.492 140.081,138.557 124.587,138.557 124.587,133.731 124.333,133.477 119.38,133.477 119.507,133.985 119.507,141.732 120.015,142.24 146.685,142.24
NetR25_2 on Bottom Layer "NETR25_2_L02_P091" (solid, pour order 91): 36.264,158.009 36.344,158.009 40.709,158.009 40.709,151.151 40.455,150.897 36.264,150.897
NetR21_1 on Bottom Layer "NETR21_1_L02_P090" (solid, pour order 90): 30.051,158.263 30.131,158.263 34.496,158.263 34.496,151.405 34.242,151.151 30.051,151.151
NetR20_1 on Bottom Layer "NETR20_1_L02_P089" (solid, pour order 89): 227.754,157.12 227.834,157.12 232.199,157.12 232.199,150.262 231.945,150.008 227.754,150.008
NetR26_2 on Bottom Layer "NETR26_2_L02_P088" (solid, pour order 88): 222.446,157.247 222.526,157.247 226.891,157.247 226.891,150.389 226.637,150.135 222.446,150.135
NetR16_1 on Bottom Layer "NETR16_1_L02_P087" (solid, pour order 87): 228.044,168.01 228.124,168.01 232.489,168.01 232.489,161.152 232.235,160.898 228.044,160.898
NetR19_1 on Bottom Layer "NETR19_1_L02_P086" (solid, pour order 86): 221.948,168.296 222.028,168.296 226.393,168.296 226.393,161.438 226.139,161.184 221.948,161.184
NetR5_1 on Bottom Layer "NETR5_1_L02_P085" (solid, pour order 85): 227.975,189.886 228.055,189.886 232.42,189.886 232.42,183.028 232.166,182.774 227.975,182.774
NetR9_2 on Bottom Layer "NETR9_2_L02_P084" (solid, pour order 84): 221.879,190.013 221.959,190.013 226.324,190.013 226.324,183.155 226.07,182.901 221.879,182.901
NetR1_1 on Bottom Layer "NETR1_1_L02_P083" (solid, pour order 83): 228.034,200.808 228.114,200.808 232.479,200.808 232.479,193.95 232.225,193.696 228.034,193.696
NetR3_1 on Bottom Layer "NETR3_1_L02_P082" (solid, pour order 82): 221.938,200.681 222.018,200.681 226.383,200.681 226.383,193.823 226.129,193.569 221.938,193.569
NetR18_1 on Bottom Layer "NETR18_1_L02_P081" (solid, pour order 81): 35.824,168.169 35.904,168.169 40.269,168.169 40.269,161.311 40.015,161.057 35.824,161.057
NetR17_1 on Bottom Layer "NETR17_1_L02_P080" (solid, pour order 80): 30.236,168.169 30.316,168.169 34.681,168.169 34.681,161.311 34.427,161.057 30.236,161.057
NetR10_2 on Bottom Layer "NETR10_2_L02_P079" (solid, pour order 79): 35.756,190.394 35.836,190.394 40.201,190.394 40.201,183.536 39.947,183.282 35.756,183.282
NetR6_1 on Bottom Layer "NETR6_1_L02_P078" (solid, pour order 78): 30.422,190.267 30.502,190.267 34.867,190.267 34.867,183.409 34.613,183.155 30.422,183.155
NetR4_1 on Bottom Layer "NETR4_1_L02_P077" (solid, pour order 77): 36.068,201.17 36.186,201.17 40.551,201.17 40.551,194.312 40.297,194.058 36.106,194.058
NetR2_1 on Bottom Layer "NETR2_1_L02_P076" (solid, pour order 76): 30.48,200.914 30.56,200.914 34.925,200.914 34.925,194.056 34.671,193.802 30.48,193.802
NetC1_2 on Bottom Layer "NETC1_2_L02_P075" (solid, pour order 75): 0.254,185.293 0.254,213.233 267.081,213.233 267.081,76.327 252.222,76.327 252.222,193.421 243.713,201.93 197.866,201.93 191.262,195.326 191.06,195.528 44.831,195.528 44.831,200.025 41.402,203.454 21.844,203.454 21.844,194.945 12.192,185.293
GND on Bottom Layer "GND_L02_P074" (solid, pour order 74): 46.482,157.099 46.609,156.972 46.609,143.51 239.395,143.51 241.3,145.415 241.173,145.542 241.173,148.463 202.692,148.463 193.675,157.48
GND on Bottom Layer "GND_L02_P073" (solid, pour order 73): 26.67,149.733 41.783,149.733 41.783,145.034 31.877,135.128 21.082,135.128 20.955,135.001 20.701,135.255 20.701,142.24 0.127,142.24 0.127,162.687 26.214,162.687 26.289,162.762 26.67,162.381
A on Bottom Layer "A_L02_P071" (solid, pour order 71): 173.228,97.997 167.513,97.997 167.513,101.299 173.228,101.299
NetG1_9 on Bottom Layer "NETG1_9_L02_P070" (solid, pour order 70): 169.684,91.893 169.684,97.608 172.986,97.608 172.986,91.893
NetG2_9 on Bottom Layer "NETG2_9_L02_P069" (solid, pour order 69): 112.999,91.766 112.999,97.481 116.301,97.481 116.301,91.766
B on Bottom Layer "B_L02_P068" (solid, pour order 68): 111.197,101.089 116.912,101.089 116.912,97.787 111.197,97.787
NetG1_11 on Bottom Layer "NETG1_11_L02_P067" (solid, pour order 67): 169.236,116.456 174.951,116.456 174.951,113.154 169.236,113.154
NetG3_9 on Bottom Layer "NETG3_9_L02_P063" (solid, pour order 63): 56.134,97.533 59.69,97.533 59.69,92.837 56.134,92.837
C on Bottom Layer "C_L02_P062" (solid, pour order 62): 54.864,101.089 59.817,101.089 59.817,97.787 54.864,97.787
NetG3_11 on Bottom Layer "NETG3_11_L02_P061" (solid, pour order 61): 56.134,116.332 61.849,116.332 61.849,113.03 56.134,113.03
NetC34_1 on Bottom Layer "NETC34_1_L02_P053" (solid, pour order 53): 53.033,49.427 78.105,49.427 78.105,39.394 53.532,39.394 53.033,39.894
NetC18_1 on Bottom Layer "NETC18_1_L02_P052" (solid, pour order 52): 142.187,48.792 166.37,48.792 166.37,38.759 142.686,38.759 142.187,39.259
NetC30_2 on Bottom Layer "NETC30_2_L02_P041" (solid, pour order 41): 212.725,38.481 212.852,38.354 212.852,7.874 264.287,7.874 264.287,15.875 231.521,15.875 223.393,24.003 223.393,38.608
NetC34_2 on Bottom Layer "NETC34_2_L02_P039" (solid, pour order 39): 30.861,40.513 44.577,40.513 44.577,20.828 48.387,17.018 79.502,17.018 79.502,7.62 31.115,7.62
GND on Bottom Layer "GND_L02_P066" (solid, pour order 66): 169.236,120.012 174.951,120.012 174.951,116.71 169.236,116.71
NetG2_11 on Bottom Layer "NETG2_11_L02_P065" (solid, pour order 65): 113.356,116.075 119.071,116.075 119.071,112.773 113.356,112.773
GND on Bottom Layer "GND_L02_P064" (solid, pour order 64): 113.102,119.885 118.817,119.885 118.817,116.583 113.102,116.583
GND on Bottom Layer "GND_L02_P060" (solid, pour order 60): 56.134,119.126 57.023,120.015 61.849,120.015 61.849,116.84 56.134,116.84
NetC30_1 on Bottom Layer "NETC30_1_L02_P051" (solid, pour order 51): 237.752,48.641 264.668,48.641 264.668,38.608 238.252,38.608 237.752,39.108
NetC18_2 on Bottom Layer "NETC18_2_L02_P040" (solid, pour order 40): 118.364,37.719 118.364,8.509 118.11,8.255 120.904,5.461 166.878,5.461 166.878,18.669 130.937,18.669 130.937,35.433 128.905,37.465
PGND on Bottom Layer "PGND_L02_P038" (solid, pour order 38): 250.444,66.04 267.462,66.04 267.462,49.53 248.666,49.53 248.666,50.8 248.285,51.181 238.379,51.181 237.49,52.07 50.038,52.07 50.038,58.293 50.546,58.801 238.379,58.801 238.379,139.065 242.824,143.51 242.824,171.323 220.128,171.323 217.17,168.365 217.17,160.274 45.974,160.274 45.974,132.08 41.275,127.381 33.274,127.381 33.274,132.842 43.18,142.748 43.18,169.799 20.193,169.799 20.066,180.467 20.193,180.34 43.18,180.213 46.482,180.34 46.482,193.167 70.866,193.167 217.17,193.167 217.17,180.766 250.444,180.766
NetL2_1 on Bottom Layer "NETL2_1_L02_P034" (solid, pour order 34): 177.8,46.863 205.359,46.863 205.486,46.736 205.486,25.781 188.087,25.781 177.8,25.781
NetL4_1 on Bottom Layer "NETL4_1_L02_P033" (solid, pour order 33): 85.945,48.641 112.395,48.641 112.395,25.654 112.522,25.527 112.014,25.019 86.131,25.019
NetL6_1 on Bottom Layer "NETL6_1_L02_P032" (solid, pour order 32): 1.27,51.435 24.384,51.435 24.511,51.308 24.511,25.4 1.27,25.4

## Silkscreen, mask and mechanical layers (free items; w line width, h text height)
Mechanical 1:
  lines w0.254: 0,0 0,212.852 0,213.36 0.508,213.36 267.462,213.36 267.462,0 0,0

## Text inside footprints (layer, text, board x,y; h text height)
G1: Top Overlay "Gate Driver 2IN1IGDBV1" at 203.476,105.737 h0.7 r180
G2: Top Overlay "Gate Driver 2IN1IGDBV1" at 147.11,105.807 h0.7 r180
G3: Top Overlay "Gate Driver 2IN1IGDBV1" at 89.96,105.985 h0.7 r180